# Altium PCB PCB.PcbDoc (part 2 of 3)
Units mm, origin at the board's own origin, x right, y up, seen from the top; angles counter-clockwise.
Board outline 103.89 x 68.2 mm, 6 copper layers (Top Layer, GND1, Internal 1, VCC, Internal 2, Bottom Layer), stack 0.851 mm thick; 117 components, 96 nets, 737 pads, 258 vias.
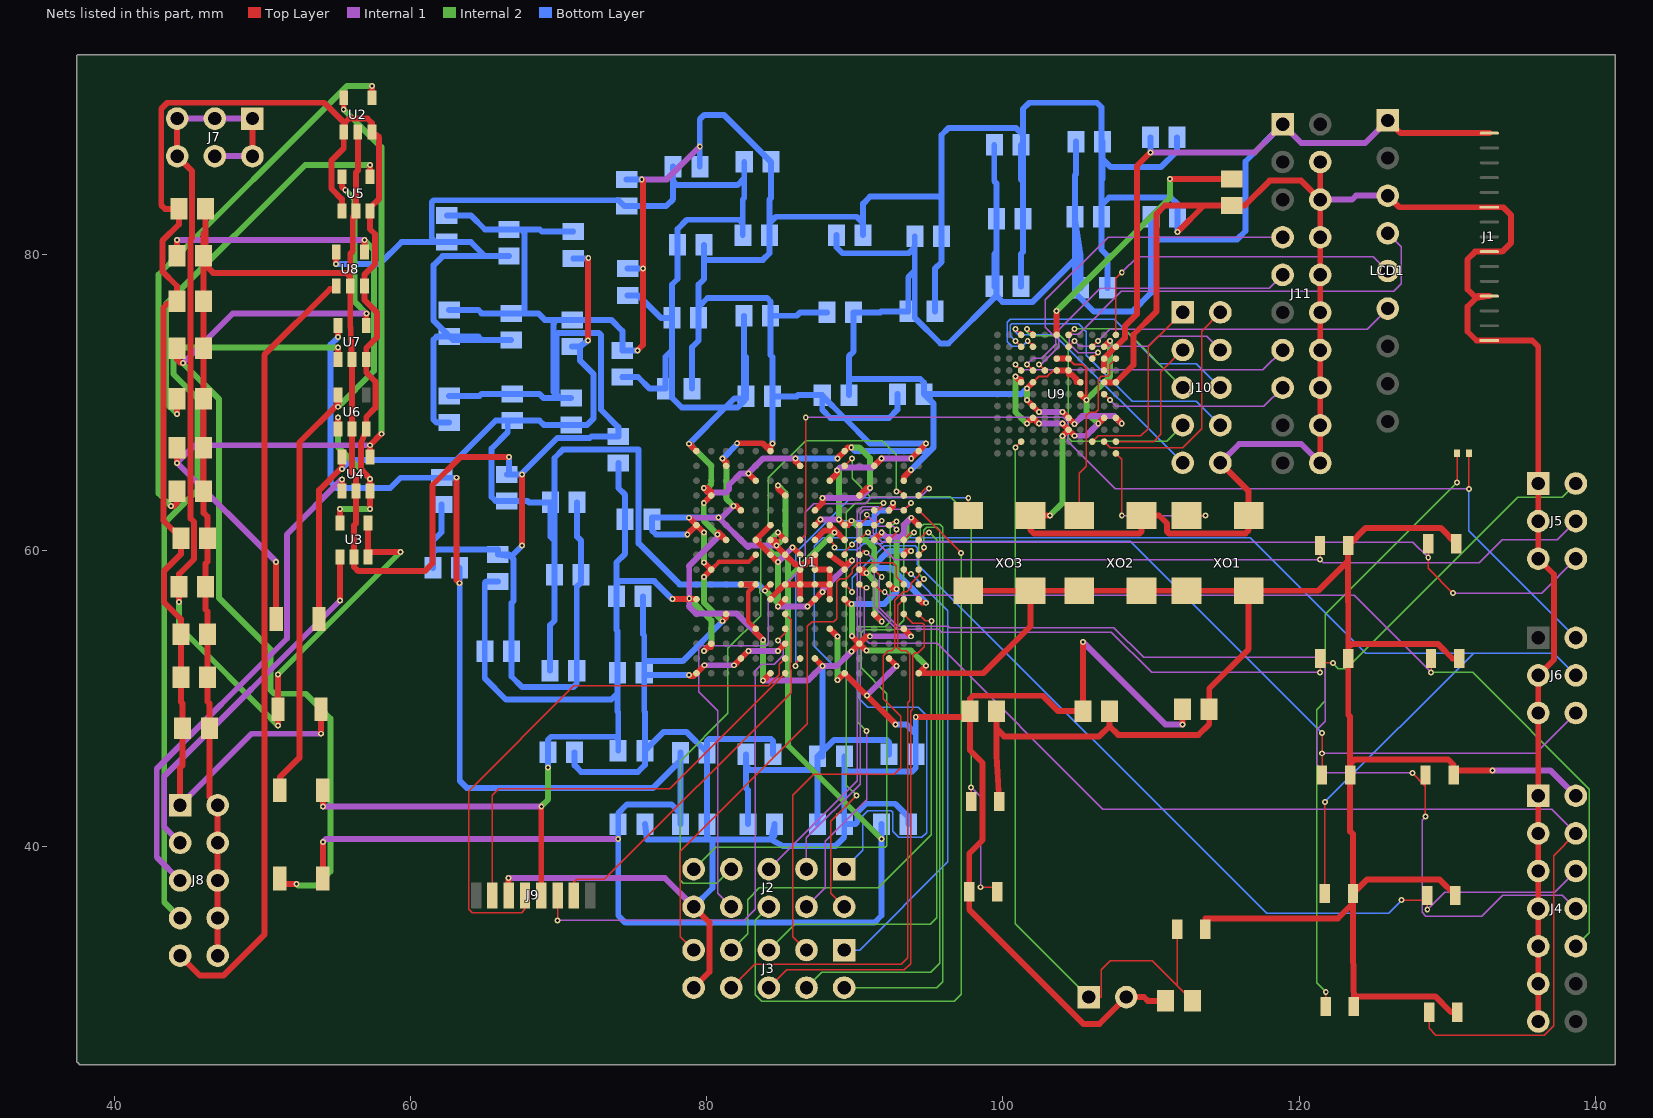
[diagram p6: the nets of this part, all layers, seen from the top]

## Via types
v1: diameter 0.4, hole 0.2, Top Layer to Bottom Layer, tented both sides, 258 vias

## Nets (pads, with @x,y where several pads share a name; then routed paths per layer and width w, separated by ;. In a path a pad name is that pad's centre, name@x,y a point inside that pad or via, vN(x,y) a via of type N, cw(c..) or ccw(c..) an arc to the next point about the centre after c; other vN are vias at no path point) (continued)
GND: C1.1 C2.1 C3.1 C4.1 C5.1 C6.1 C7.1 C8.1 C9.1 C10.1 C11.1 C12.1 C13.1 C14.1 C15.1 C16.1 C17.1 C18.1 C19.1 C20.1 C21.1 C22.1 C23.1 C24.1 C25.1 C26.1 C27.1 C28.1 C29.1 C30.1 C31.1 C32.1 C33.1 C34.1 C35.1 C36.1 C37.1 C38.1 C39.1 C40.1 C41.1 C42.1 C43.1 C44.1 C45.1 C46.1 C47.1 C48.1 C49.1 C50.1 C51.1 C52.1 C53.1 C54.1 C55.1 C56.1 C57.1 C58.1 C59.1 C60.1 C61.1 C62.1 C63.1 C64.1 C65.1 C66.1 C67.1 C68.1 C69.1 C70.1 C71.1 C72.1 C73.1 C74.1 J1.1 J1.4 J1.7 J1.10 J2.10 J3.10 J4.1 J4.3 J4.5 J4.7 J4.9 J4.11 J4.13 J5.1 J5.3 J5.5 J6.3 J6.5 J8.2 J8.4 J8.6 J8.8 J8.10 J9.6 J10.10 J11.4 J11.6 J11.8 J11.10 J11.12 J11.14 J11.16 J11.18 J11.20 LCD1.3 R2.2 SW1.2 U1.A1 U1.A11 U1.B8 U1.C5 U1.C15 U1.D2 U1.D12 U1.E9 U1.F6 U1.F10 U1.F16 U1.G3 U1.G7 U1.G9 U1.G13 U1.H6 U1.H7 U1.H8 U1.J7 U1.J8 U1.J9 U1.J11 U1.K4 U1.K6 U1.K7 U1.K8 U1.K14 U1.L1 U1.L11 U1.M8 U1.N5 U1.N15 U1.P2 U1.P12 U1.R9 U1.T6 U1.T16 U2.2 U3.2 U4.2 U5.2 U6.2 U7.2 U8.2 U9.C7 U9.D4 U9.F9 U9.G3 U9.G9 U9.H6 U9.K4 U9.K7 U9.K10 U9.L7 XO1.2 XO2.2 XO3.2 | length 863
  Top Layer w0.14: U9.G9@104.432,72.948 104.837,72.543 105.396,72.543 105.627,72.312 105.627,70.166 v1(105.639,70.155)
  Top Layer w0.3: U1.B8@80.312,58.706 80.828,59.222 82.828,59.222 U1.E9@83.312,59.706
  Top Layer w0.4: C48.1@46.173,83.058 46.173,81.509 ; J8.10@46.99,32.639 J8.8@46.99,35.179 J8.6@46.99,37.719 J8.4@46.99,40.259 J8.2@46.99,42.799 46.427,43.362 C54.1@46.427,48.006 46.427,49.657 46.3,49.784 C55.1@46.3,51.435 C49.1@46.3,54.356 46.3,55.88 46.173,56.007 C47.1@46.173,57.531 46.173,59.106 46.3,59.233 C44.1@46.3,60.833 46.3,62.281 46.046,62.535 C45.1@46.046,64.008 C46.1@46.046,66.929 C50.1@46.046,70.231 C51.1@46.046,73.66 C52.1@46.046,76.835 C53.1@46.046,79.883 46.046,81.382 46.173,81.509 ; U2.2@56.449,88.258 56.449,85.649 56.322,85.522 U5.2@56.322,82.924 56.322,82.525 56.109,82.525 56.109,80.203 55.941,80.035 55.941,78.476 ; v1(66.624,37.871) 66.636,37.86 J9.6@66.636,36.703 ; v1(66.65,66.319) 63.398,66.319 61.493,64.414 61.493,59.131 60.96,58.598 56.49,58.598 56.195,58.892 U3.2@56.195,59.556 56.195,61.697 56.322,61.824 U4.2@56.322,64.001 56.322,65.001 56.068,65.255 U6.2@56.068,68.192 U7.2@56.068,72.891 55.941,75.413 U8.2@55.941,77.844 55.941,78.476 ; v1(67.539,60.325) v1(67.539,65.132) ; v1(75.336,73.51) 75.692,73.865 v1(75.692,79.021) 75.692,84.975 v1(75.619,85.048) ; v1(78.693,61.087) U1.A11@79.312,61.706 ; v1(78.812,62.206) U1.A11@79.312,61.706 ; v1(78.816,51.587) 78.892,51.511 79.117,51.511 U1.A1@79.312,51.706 v1(79.853,52.247) ; J3.10@79.121,30.48 80.188,31.547 80.188,34.874 J2.10@79.121,35.941 ; v1(79.823,58.217) U1.B8@80.312,58.706 v1(79.823,59.195) ; v1(79.823,61.195) U1.A11@79.312,61.706 ; v1(81.073,55.22) 81.312,55.459 U1.C5@81.312,55.706 ; v1(81.077,66.192) 81.312,65.957 U1.C15@81.312,65.706 ; v1(81.812,63.003) 82.015,63.003 U1.D12@82.312,62.706 ; v1(81.853,52.247) U1.D2@82.312,52.706 v1(82.819,53.213) ; v1(82.065,67.234) 83.784,67.234 U1.F16@84.312,66.706 84.312,67.058 v1(84.46,67.206) ; U1.F6@84.312,56.706 84.312,56.749 85.269,57.706 U1.G7@85.312,57.706 U1.H7@86.312,57.706 ; v1(84.811,53.213) 84.819,53.213 U1.G3@85.312,53.706 ; v1(84.811,64.389) 84.811,64.207 U1.G13@85.312,63.706 ; U1.H6@86.312,56.706 U1.H7@86.312,57.706 ; U1.H8@86.312,58.706 U1.H7@86.312,57.706 ; U1.J11@87.312,61.706 v1(87.684,62.078) ; U1.K4@88.312,54.706 v1(88.824,54.194) ; U1.K6@88.312,56.706 U1.K7@88.312,57.706 ; U1.K14@88.312,64.706 88.812,65.206 v1(88.812,65.409) ; v1(88.824,51.257) 88.863,51.257 U1.L1@89.312,51.706 v1(90.812,50.206) v1(92.758,48.26) ; v1(88.94,62.078) U1.L11@89.312,61.706 89.56,61.706 89.56,61.773 v1(89.789,62.001) ; U1.N5@91.312,55.706 91.821,55.197 v1(91.821,55.194) ; U1.N15@91.312,65.706 v1(91.812,66.206) ; U1.P2@92.312,52.706 v1(92.812,52.206) ; U1.P12@92.312,62.706 92.573,62.967 v1(92.573,63.195) ; U1.R9@93.312,59.706 93.575,59.969 v1(93.802,59.969) ; v1(93.812,66.206) U1.T16@94.312,66.706 94.814,67.208 v1(94.818,67.208) ; v1(94.118,48.743) C74.1@97.779,48.743 ; U1.T6@94.312,56.706 94.554,56.464 v1(94.818,56.464) ; v1(100.838,71.755) 101.041,71.552 101.232,71.552 U9.C7@101.232,71.348 ; v1(101.625,68.555) 101.625,68.599 101.784,68.758 101.842,68.758 U9.D4@102.032,68.948 v1(102.425,68.555) ; v1(103.175,62.357) XO3.2@101.863,62.357 101.863,61.366 102.092,61.138 109.229,61.138 109.356,61.265 XO2.2@109.356,62.357 110.541,62.357 111.074,61.824 111.074,61.265 111.201,61.138 116.366,61.138 116.595,61.366 XO1.2@116.595,62.357 116.595,63.999 J10.10@114.681,65.913 ; U9.F9@103.632,72.948 U9.G9@104.432,72.948 ; v1(104.013,67.729) U9.G3@104.432,68.148 ; v1(104.025,68.555) U9.G3@104.432,68.148 ; v1(104.838,67.742) U9.G3@104.432,68.148 ; U9.H6@105.232,70.548 105.625,70.155 v1(105.639,70.155) ; v1(105.399,53.823) C72.1@105.399,49.149 103.734,49.149 102.692,50.19 97.982,50.19 97.779,49.987 C74.1@97.779,49.149 C74.1@97.779,48.743 ; v1(106.439,68.555) U9.K4@106.832,68.948 ; U9.K7@106.832,71.348 U9.L7@107.632,71.348 108.814,72.53 108.814,74.574 110.363,76.124 110.363,82.705 110.947,83.289 113.579,83.289 ; U9.K10@106.832,73.748 v1(107.232,74.148) ; C56.1@110.987,29.591 109.779,29.591 109.525,29.845 SW1.2@108.331,29.845 106.528,28.042 105.435,28.042 97.729,35.748 R2.2@97.729,36.957 97.729,39.538 98.628,40.437 98.628,45.658 97.779,46.507 C74.1@97.779,48.743 ; v1(111.799,81.509) 113.579,83.289 ; v1(112.13,48.26) C73.1@112.13,49.276 ; J11.20@121.424,65.901 J11.18@121.424,68.441 J11.16@121.424,70.981 J11.14@121.424,73.521 J11.12@121.424,76.061 J11.10@121.424,78.601 J11.8@121.424,81.141 J11.6@121.424,83.681 ; J11.4@121.424,86.221 J11.6@121.424,83.681 ; LCD1.3@125.984,83.947 126.763,83.168 J1.10@132.842,83.168 133.782,83.168 134.315,82.635 134.315,80.778 133.706,80.168 J1.7@132.842,80.168 131.882,80.168 131.369,79.654 131.369,77.622 131.952,77.04 ; J4.13@136.144,28.194 J4.11@136.144,30.734 J4.9@136.144,33.274 J4.7@136.144,35.814 J4.5@136.144,38.354 J4.3@136.144,40.894 J4.1@136.144,43.434 J6.5@136.144,49.022 J6.3@136.144,51.562 137.211,52.629 137.211,58.369 J5.5@136.144,59.436 J5.3@136.144,61.976 J5.1@136.144,64.516 136.144,73.762 135.738,74.168 J1.1@132.842,74.168 131.978,74.168 131.369,74.778 131.369,76.457 131.952,77.04 ; 46.173,81.509 46.173,79.248 46.681,78.74 55.677,78.74 55.941,78.476 ; v1@84.709,60.309 U1.G9@85.312,59.706 85.963,59.055 86.661,59.055 U1.J9@87.312,59.706 U1.J8@87.312,58.706 U1.K8@88.312,58.706 U1.K7@88.312,57.706 ; v1@84.709,60.309 v1(84.709,60.325) 84.709,60.579 84.582,60.706 U1.F10@84.312,60.706 v1@84.709,60.309 ; U1.H7@86.312,57.706 U1.J7@87.312,57.706 U1.K7@88.312,57.706 ; 113.579,83.289 C57.1@115.455,83.289 116.332,83.289 118.006,84.963 120.142,84.963 J11.6@121.424,83.681 ; 131.952,77.04 J1.4@132.842,77.168 132.08,77.168 131.952,77.04 ; U1.M8@90.312,58.706 90.57,58.706 v1(90.805,58.471) 90.547,58.471 U1.M8@90.312,58.706
  Internal 1 w0.4: v1(66.624,37.871) 77.191,37.871 J2.10@79.121,35.941 ; v1(75.619,85.048) 77.309,85.048 v1(79.536,87.274) ; v1(78.812,62.206) 80.797,62.227 v1@80.8,62.227 ; v1(79.853,52.247) v1(81.853,52.247) ; v1(80.797,62.23) v1@80.8,62.227 ; v1(81.812,63.003) 81.039,62.23 v1@80.8,62.227 ; v1(82.819,53.213) v1(84.811,53.213) ; v1(84.709,60.325) 82.906,60.325 82.804,60.223 v1@80.8,62.227 ; v1(87.684,62.078) v1(88.94,62.078) ; v1(88.812,65.409) 89.011,65.608 91.214,65.608 v1(91.812,66.206) v1(93.812,66.206) ; v1(90.812,50.206) v1(92.812,52.206) ; v1(102.425,68.555) v1(104.025,68.555) ; v1(104.838,67.742) 105.626,67.742 v1(106.439,68.555) ; v1(105.399,53.823) 110.962,48.26 v1(112.13,48.26) ; J10.10@114.681,65.913 115.951,67.183 120.142,67.183 J11.20@121.424,65.901 ; J11.6@121.424,83.681 123.571,83.681 123.837,83.947 LCD1.3@125.984,83.947
  Internal 2 w0.4: v1(79.823,58.217) 79.823,56.47 v1(81.073,55.22) ; v1(79.823,59.195) v1(79.823,61.195) ; v1(81.077,66.192) 81.331,65.938 81.331,63.484 v1(81.812,63.003) ; v1(84.709,60.325) 85.319,60.935 85.319,63.881 v1(84.811,64.389) ; v1(88.812,65.409) 88.94,65.281 v1(88.94,62.078) ; v1(88.824,51.257) v1(88.824,54.194) ; v1(89.789,62.001) 89.814,62.001 90.322,61.493 90.322,60.96 90.576,60.706 90.754,60.706 91.313,60.147 91.313,58.979 v1(90.805,58.471) 91.389,57.887 91.389,55.626 v1(91.821,55.194) ; v1(100.838,71.755) 100.838,69.342 v1(101.625,68.555) ; v1(103.175,62.357) 104.013,63.195 v1(104.013,67.729) ; v1(106.439,68.555) 105.639,69.355 v1(105.639,70.155) 107.239,71.755 107.232,71.762 v1(107.232,74.148)
  Bottom Layer w0.4: C35.1@61.53,58.818 61.53,59.828 ; C36.1@62.103,63.108 62.103,61.229 61.53,60.655 61.53,59.828 ; C39.1@62.468,82.623 64.084,82.623 65.04,81.667 C12.1@66.657,81.667 67.462,81.667 ; C37.1@62.615,70.423 64.668,70.423 64.815,70.57 C10.1@66.877,70.57 68.707,70.57 69.001,70.276 70.084,70.276 ; C38.1@62.615,76.229 64.592,76.229 64.813,76.008 C11.1@66.804,76.008 67.564,76.008 ; C9.1@66.51,65.132 C9.1@66.65,65.132 ; v1(66.65,66.319) C9.1@66.65,65.132 ; v1(67.539,60.325) 66.788,59.574 ; v1(67.539,65.132) v1@67.462,65.132 ; C21.1@70.846,70.276 70.104,70.276 ; C23.1@70.993,81.52 68.879,81.52 68.732,81.667 67.462,81.667 ; C43.1@71.084,46.373 71.084,45.487 71.526,45.045 75.358,45.045 75.83,45.517 C28.1@75.83,46.482 ; C20.1@71.258,63.246 71.258,60.923 71.525,60.655 C19.1@71.525,58.352 71.525,57.836 71.231,57.542 C18.1@71.231,51.885 71.231,51.003 71.021,50.793 67.52,50.793 66.822,51.491 C29.1@66.822,53.208 66.822,56.439 66.954,56.571 66.954,59.407 66.788,59.574 ; C3.1@74.3,73.51 C3.1@74.32,73.51 ; C5.1@74.594,85.048 v1(75.619,85.048) ; C4.1@74.667,79.021 v1(75.692,79.021) ; v1(75.336,73.51) C3.1@74.32,73.51 ; C17.1@75.703,56.896 75.703,54.339 75.788,54.254 75.788,52.527 ; C34.1@75.83,41.529 75.982,40.488 80.264,40.488 ; v1(78.693,61.087) 76.582,61.087 76.302,61.366 C1.1@76.302,62.1 76.302,62.23 v1(80.797,62.23) ; v1(78.816,51.587) C16.1@75.788,51.587 ; C40.1@79.021,70.919 79.021,73.733 79.462,74.174 C13.1@79.462,75.696 79.462,76.44 ; J2.10@79.121,35.941 80.391,37.211 80.391,40.488 ; C6.1@79.536,85.912 v1(79.536,87.274) 79.536,89.101 79.843,89.408 81.164,89.408 C7.1@84.339,86.233 84.339,83.793 84.239,83.693 84.239,82.093 ; C24.1@79.83,80.62 79.83,79.654 ; v1(81.073,55.22) 78.38,52.527 75.788,52.527 ; v1(81.077,66.192) 82.065,67.18 v1(82.065,67.234) ; v1(84.46,67.206) C14.1@84.46,70.405 ; C26.1@84.466,46.228 84.466,47.142 84.339,47.269 80.148,47.269 80.021,47.142 C31.1@80.021,46.355 ; C62.1@88.127,76.073 86.31,76.073 86.081,75.843 C25.1@84.313,75.843 ; v1(88.94,62.078) 89.169,61.849 91.034,61.849 91.313,62.128 91.313,62.382 91.618,62.687 92.268,62.687 92.573,62.992 v1(92.573,63.195) ; C15.1@89.292,46.101 89.292,45.314 ; C67.1@90.562,81.28 90.562,82.093 ; v1(90.805,58.471) 91.161,58.826 ; v1(92.758,48.26) 93.472,48.26 94.118,47.614 ; C64.1@92.875,70.552 92.875,69.494 92.316,68.936 89.303,68.936 ; C32.1@93.61,41.529 93.61,42.017 92.729,42.898 90.763,42.898 90.17,42.305 90.17,41.656 90.043,41.529 C42.1@89.292,41.529 ; v1(93.802,59.969) 92.304,59.969 91.161,58.826 ; v1(94.118,48.743) 94.118,47.614 ; v1(94.818,56.464) 92.456,58.826 91.161,58.826 ; v1(94.818,67.208) 91.031,67.208 89.303,68.936 ; C63.1@95.41,76.137 95.41,79.016 95.851,79.457 C68.1@95.851,81.208 95.851,83.718 ; C69.1@101.216,77.828 101.216,80.01 101.363,80.157 C59.1@101.363,82.384 101.363,84.887 ; C70.1@101.219,87.376 101.219,85.031 101.363,84.887 ; C71.1@106.728,87.602 106.728,86.439 ; C58.1@107.05,77.724 107.05,79.908 106.654,80.304 C60.1@106.654,82.531 106.654,83.312 ; C66.1@111.76,87.884 111.76,86.97 110.668,85.877 107.29,85.877 106.728,86.439 ; v1(111.799,81.509) C61.1@111.799,82.531 111.799,83.375 111.354,83.82 107.162,83.82 106.654,83.312 ; 61.53,59.828 61.773,60.071 65.913,60.071 C30.1@65.913,59.712 ; C30.1@65.913,59.712 66.65,59.712 66.788,59.574 ; C30.1@65.913,59.712 66.788,59.574 ; C9.1@66.65,65.132 v1@67.462,65.132 ; v1@67.462,65.132 69.92,67.589 72.111,67.589 72.223,67.702 C2.1@74.041,67.702 74.041,68.326 72.873,69.494 72.873,74.549 72.746,74.676 69.977,74.676 69.875,74.574 69.875,70.505 70.104,70.276 ; 67.462,81.667 67.691,81.439 67.691,76.135 67.564,76.008 ; 67.564,76.008 68.631,76.008 69.072,75.567 69.901,75.567 ; 69.901,75.567 C22.1@70.919,75.567 73.558,75.567 74.32,74.805 C3.1@74.32,73.51 ; 69.901,75.567 69.647,75.313 69.647,70.714 70.084,70.276 ; 70.084,70.276 70.104,70.276 ; C16.1@75.788,51.587 75.788,49.115 75.83,49.073 C28.1@75.83,46.482 ; C16.1@75.788,51.587 C16.1@75.788,51.738 75.788,52.527 ; C28.1@75.83,46.482 77.1,47.752 78.624,47.752 C31.1@80.021,46.355 ; 79.462,76.44 80.061,77.038 84.084,77.038 84.313,76.81 C25.1@84.313,75.843 ; 79.462,76.44 79.462,77.953 79.83,78.32 79.83,79.654 ; 79.83,79.654 79.868,79.617 83.795,79.617 84.239,80.061 C8.1@84.239,81.282 84.239,82.093 ; C31.1@80.021,46.355 C33.1@80.021,41.529 80.021,40.731 80.264,40.488 ; 80.264,40.488 80.391,40.488 ; 80.391,40.488 84.328,40.488 ; 84.239,82.093 84.671,82.525 90.13,82.525 90.562,82.093 ; C25.1@84.313,75.843 84.313,73.197 84.46,73.05 C14.1@84.46,70.405 ; 84.328,40.488 84.593,40.753 C27.1@84.593,41.529 84.328,40.488 ; 84.328,40.488 85.203,40.03 88.682,40.03 89.292,40.64 C42.1@89.292,41.529 ; C14.1@84.46,70.405 86.081,70.405 86.154,70.478 C65.1@87.804,70.478 C65.1@87.804,70.435 ; C65.1@87.804,70.435 89.303,68.936 ; C65.1@87.804,70.435 87.804,69.494 88.363,68.936 89.303,68.936 ; C42.1@89.292,41.529 89.292,45.314 ; 89.292,45.314 89.535,45.071 93.878,45.071 94.118,45.31 C41.1@94.118,46.228 94.118,47.614 ; 90.562,82.093 90.562,83.41 91.034,83.882 95.688,83.882 95.851,83.718 ; 95.851,83.718 95.851,88.045 96.317,88.511 100.897,88.511 C70.1@101.363,88.045 ; 101.363,84.887 C70.1@101.363,88.045 ; C70.1@101.363,88.045 101.363,89.814 101.769,90.221 106.35,90.221 106.654,89.916 106.654,85.014 ; 106.654,83.312 106.654,85.014 ; 106.654,85.014 106.728,85.087 106.728,86.439
ISENS_1V0: J8.5 U4.1 | length 33.7
  Top Layer w0.4: U4.1@55.372,64.001 v1(55.372,64.795)
  Internal 1 w0.4: J8.5@44.45,37.719 42.875,39.294 42.875,45.263 51.664,54.051 51.664,61.087 v1(55.372,64.795)
ISENS_1V8: J8.7 U7.1 | length 52.1
  Top Layer w0.4: U7.1@55.118,72.891 v1(55.118,73.685)
  Internal 2 w0.4: J8.7@44.45,35.179 43.383,36.246 43.383,61.824 45.618,64.059 45.618,70.281 43.992,71.907 43.992,72.984 44.694,73.685 v1(55.118,73.685)
ISENS_3V3: J8.9 U8.1 | length 53.4
  Top Layer w0.4: J8.9@44.45,32.639 45.796,31.293 47.371,31.293 50.14,34.061 50.14,73.203 54.585,77.648 54.991,77.648 U8.1@54.991,77.844
ISENS_UNREG: J8.3 U3.1 | length 24.7
  Top Layer w0.4: v1(55.245,56.617) U3.1@55.245,59.556
  Internal 1 w0.4: J8.3@44.45,40.259 43.383,41.326 43.383,44.755 v1(55.245,56.617)
NetC45_2: C45.2 U2.4 | length 37.8
  Top Layer w0.4: v1(43.84,62.992) 44.043,62.992 44.246,63.195 C45.2@44.246,64.008 ; U2.4@57.399,90.558 57.399,91.359 v1(57.404,91.364)
  Internal 2 w0.4: v1(43.84,62.992) 42.992,63.84 42.992,78.629 55.728,91.364 v1(57.404,91.364)
NetC46_2: C46.2 R13.2 U2.5 U4.4 | length 53.5
  Top Layer w0.4: v1(44.246,65.913) C46.2@44.246,66.929 ; R13.2@50.935,55.372 v1(50.935,59.224) ; v1(55.499,89.764) U2.5@55.499,90.558 ; U4.4@57.272,66.301 v1(57.272,67.101) v1(58.039,67.874)
  Internal 1 w0.4: v1(50.935,59.224) v1(44.246,65.913) 45.434,67.101 v1(57.272,67.101)
  Internal 2 w0.4: v1(55.499,89.764) 58.039,87.224 v1(58.039,67.874)
NetC50_2: C50.2 U5.4 | length 27.2
  Top Layer w0.4: v1(44.247,69.215) C50.2@44.246,70.231 ; U5.4@57.272,85.224 57.272,86.02 v1(57.277,86.025)
  Internal 2 w0.4: v1(44.247,69.215) 43.492,69.969 43.492,76.614 52.903,86.025 v1(57.277,86.025)
NetC51_2: C51.2 R15.2 U5.5 U7.4 | length 69.6
  Top Layer w0.4: C51.2@44.246,73.66 44.246,72.899 44.501,72.644 v1(44.652,72.644) ; R15.2@51.189,37.846 51.189,37.49 v1(52.299,37.49) ; U5.5@55.372,85.224 55.372,84.557 v1(55.601,84.328) ; U7.4@57.018,75.191 57.018,75.992 v1(57.023,75.997)
  Internal 1 w0.4: v1(44.652,72.644) 48.005,75.997 v1(57.023,75.997)
  Internal 2 w0.4: v1(44.652,72.644) 47.066,70.23 47.066,56.794 50.562,53.299 50.562,50.563 50.8,50.325 52.934,50.325 54.61,48.649 54.61,38.329 53.67,37.389 52.4,37.389 v1(52.299,37.49) ; v1(55.601,84.328) 56.236,83.693 56.236,76.784 v1(57.023,75.997)
NetC53_2: C53.2 R16.2 U6.5 U8.4 | length 55.5
  Top Layer w0.4: C53.2@44.246,79.883 v1(44.246,80.944) ; R16.2@51.189,43.815 51.189,44.687 52.502,45.999 52.502,67.285 55.118,69.901 ; v1(55.118,69.698) 55.118,69.901 ; U6.5@55.118,70.492 55.118,69.901 ; U8.4@56.891,80.144 v1(56.891,80.944)
  Internal 1 w0.4: v1(44.246,80.944) v1(56.891,80.944)
  Internal 2 w0.4: v1(55.118,69.698) 57.531,72.111 57.531,80.304 v1(56.891,80.944)
NetC57_2: C57.2 U9.F11 | length 17.9
  Top Layer w0.4: U9.F11@103.632,74.548 v1(103.632,76.175) ; v1(111.277,85.089) C57.2@115.455,85.089
  Internal 2 w0.4: v1(103.632,76.175) 111.277,83.82 v1(111.277,85.089)
NetD1_1: D1.1 J6.2 U1.H10 | length 71.4
  Top Layer w0.1: U1.H10@86.312,60.706 86.69,61.084 v1(86.69,68.986) ; v1(131.464,64.16) D1.1@131.464,66.548
  Internal 1 w0.1: v1(86.69,68.986) 104.089,68.986 104.394,68.682 104.394,67.361 107.594,64.16 v1(131.464,64.16)
  Bottom Layer w0.1: v1(131.464,64.16) 131.464,61.322 J6.2@138.684,54.102
NetD1_2: D1.2 R10.2 | length 41.5
  Top Layer w0.1: R10.2@121.798,29.21 v1(121.798,30.201) ; v1(130.664,64.592) D1.2@130.664,66.548
  Internal 2 w0.1: v1(121.798,30.201) 121.183,30.815 121.183,49.251 121.768,49.835 121.768,55.696 v1(130.664,64.592)
NetJ4_4: J4.4 R3.2 U1.M7 | length 81.1
  Top Layer w0.1: U1.M7@90.312,57.706 90.538,57.48 v1(90.805,57.48) ; R3.2@128.778,28.829 128.778,27.737 129.235,27.28 136.55,27.28 137.185,27.915 137.185,39.395 J4.4@138.684,40.894
  Internal 1 w0.1: v1(90.805,57.48) 90.653,57.328 90.653,54.051 90.983,53.721 95.555,53.721 106.756,42.52 137.058,42.52 J4.4@138.684,40.894
NetJ4_6: J4.6 R4.2 U1.L7 | length 64.7
  Top Layer w0.1: U1.L7@89.312,57.706 v1(89.814,57.204) ; v1(126.924,36.398) R4.2@128.651,36.398 ; v1(128.651,35.753) R4.2@128.651,36.398 ; R4.2@128.651,36.703 R4.2@128.651,36.398
  Internal 1 w0.1: v1(128.651,35.753) 129.83,36.932 137.262,36.932 J4.6@138.684,38.354
  Bottom Layer w0.1: v1(89.814,57.204) 89.814,58.141 91.999,60.325 94.082,60.325 94.234,60.173 94.234,59.08 117.805,35.509 126.035,35.509 v1(126.924,36.398)
NetJ4_8: J4.8 R5.2 U1.N8 | length 70.2
  Top Layer w0.1: U1.N8@91.312,58.706 v1(91.821,58.197) ; v1(127.64,44.983) 128.529,44.094 ; v1(128.529,42.022) 128.529,44.094 ; R5.2@128.529,44.831 128.529,44.094
  Internal 1 w0.1: v1(91.821,58.197) 91.669,58.045 91.669,56.137 92.913,54.893 96.291,54.893 96.397,54.788 107.493,54.788 109.499,52.781 121.107,52.781 121.768,52.121 121.768,48.463 121.183,47.879 121.183,45.517 121.717,44.983 v1(127.64,44.983) ; v1(128.529,42.022) 128.295,41.788 128.295,35.56 128.549,35.306 132.334,35.306 133.756,36.728 137.77,36.728 J4.8@138.684,35.814
NetJ4_10: J4.10 R6.2 U1.N7 | length 65.9
  Top Layer w0.1: U1.N7@91.312,57.706 91.817,57.201 v1(92.024,57.201) ; v1(128.905,51.765) R6.2@128.905,52.705
  Internal 1 w0.1: v1(92.024,57.201) 92.263,56.962 123.708,56.962 v1(128.905,51.765)
  Internal 2 w0.1: v1(128.905,51.765) 131.724,51.765 139.598,43.891 139.598,34.188 J4.10@138.684,33.274
NetJ5_2: J5.2 R7.2 U1.M9 | length 60
  Top Layer w0.1: U1.M9@90.312,59.706 90.627,60.021 v1(90.805,59.842) ; v1(121.412,51.765) 121.417,51.77 R7.2@121.417,52.4 ; R7.2@121.417,52.705 R7.2@121.417,52.4 ; v1(122.276,52.4) R7.2@121.417,52.4
  Internal 1 w0.1: v1(90.805,59.842) 91.313,59.334 91.313,56.21 92.83,54.693 95.675,54.693 95.885,54.483 107.315,54.483 110.033,51.765 v1(121.412,51.765)
  Internal 2 w0.1: v1(122.276,52.4) 122.657,52.019 123.165,52.019 134.747,63.602 137.77,63.602 J5.2@138.684,64.516
NetJ5_4: J5.4 R8.2 U1.M10 | length 51.5
  Top Layer w0.1: U1.M10@90.312,60.706 90.812,61.206 v1(90.89,61.206) ; v1(121.412,59.385) R8.2@121.412,60.325
  Internal 1 w0.1: v1(90.89,61.206) 92.711,59.385 v1(121.412,59.385) 121.641,59.157 132.156,59.157 133.706,60.706 137.414,60.706 J5.4@138.684,61.976
NetJ5_6: J5.6 R9.2 U1.M11 | length 53.8
  Top Layer w0.1: U1.M11@90.312,61.706 90.811,62.205 v1(90.811,62.408) ; R9.2@128.717,60.452 v1(128.717,59.522) 128.717,58.786 v1(130.378,57.125)
  Internal 1 w0.1: v1(90.811,62.408) 91.262,61.956 91.262,61.16 91.863,60.559 127.68,60.559 v1(128.717,59.522) ; v1(130.378,57.125) 136.373,57.125 J5.6@138.684,59.436
NetJ6_4: J6.4 R11.2 U1.L9 | length 74.2
  Top Layer w0.1: U1.L9@89.312,59.706 89.312,59.944 89.357,59.944 v1(89.814,60.401) ; R11.2@121.732,36.83 v1(121.732,43.017)
  Bottom Layer w0.1: v1(89.814,60.401) 90.052,60.638 91.293,60.638 91.513,60.858 116.688,60.858 124.485,53.061 131.775,53.061 ; v1(121.732,43.017) 131.775,53.061 ; J6.4@138.684,51.562 137.185,53.061 131.775,53.061
NetJ6_6: J6.6 R12.2 U1.K10 | length 60.3
  Top Layer w0.1: U1.K10@88.312,60.706 88.621,60.397 v1(88.621,60.198) ; R12.2@121.544,44.831 v1(121.544,46.304) v1(121.544,47.671)
  Internal 1 w0.1: v1(121.544,46.304) 135.966,46.304 J6.6@138.684,49.022
  Bottom Layer w0.1: v1(88.621,60.198) 88.773,60.046 90.17,60.046 90.563,60.438 91.818,60.438 91.984,60.604 108.61,60.604 v1(121.544,47.671)
NetLCD1_4: LCD1.4 U9.J9 | length 31
  Top Layer w0.1: U9.J9@106.032,72.948 106.032,73.152 106.223,73.152 v1(106.426,73.355)
  Internal 1 w0.1: v1(106.426,73.355) 105.08,73.355 104.47,73.965 104.47,74.371 104.699,74.6 105.105,74.6 108.001,77.495 126.39,77.495 126.898,78.003 126.898,80.493 LCD1.4@125.984,81.407
NetLCD1_5: LCD1.5 U9.L11 | length 23.2
  Top Layer w0.1: U9.L11@107.632,74.548 107.632,78.371 v1(108.026,78.765)
  Internal 1 w0.1: v1(108.026,78.765) 109.093,79.832 125.019,79.832 LCD1.5@125.984,78.867
NetLCD1_6: LCD1.6 U9.J10 | length 21
  Top Layer w0.1: U9.J10@106.032,73.748 v1(106.426,74.143)
  Internal 1 w0.1: v1(106.426,74.143) 107.213,74.93 124.587,74.93 LCD1.6@125.984,76.327
NetR1_2: R1.2 R2.1 U1.L15 | length 38.8
  Top Layer w0.1: U1.L15@89.312,65.706 89.814,66.208 v1(89.814,66.218) ; R1.2@97.856,43.053 v1(97.856,44.003) ; v1(98.501,37.262) 99.629,37.262 R2.1@99.629,36.957
  Internal 1 w0.1: v1(97.856,44.003) 98.501,43.358 v1(98.501,37.262)
  Internal 2 w0.1: v1(89.814,66.218) 89.814,64.859 91.046,63.627 96.444,63.627 97.856,62.215 v1(97.856,44.003)
NetU1_H2: U1.H2 XO3.3@97.663,62.357 | length 22.7
  Top Layer w0.1: v1(86.004,52.197) 86.004,52.398 U1.H2@86.312,52.706 ; XO3.3@97.663,62.357 v1(97.663,63.551)
  Bottom Layer w0.1: v1(86.004,52.197) 86.004,59.842 89.713,63.551 v1(97.663,63.551)
NetU9_L1: U9.L1 XO1.3@112.395,62.357 | length 11.3
  Top Layer w0.1: U9.L1@107.632,66.548 108.026,66.154 v1(108.026,62.357) ; XO1.3@112.395,62.357 v1(113.69,62.357)
  Internal 1 w0.1: v1(108.026,62.357) v1(113.69,62.357)
NetU9_L9: U9.L9 XO2.3@105.156,62.357 | length 12.1
  Top Layer w0.1: XO2.3@105.156,62.357 105.156,65.202 105.639,65.684 105.639,69.113 105.867,69.342 106.274,69.342 106.426,69.494 106.426,71.526 106.655,71.755 107.086,71.755 107.213,71.882 107.213,72.529 U9.L9@107.632,72.948
RESET: J11.15 U9.K6 | length 12.9
  Top Layer w0.1: U9.K6@106.832,70.548 v1(107.225,70.155)
  Internal 1 w0.1: v1(107.225,70.155) 107.657,69.723 117.626,69.723 J11.15@118.884,70.981
SDBUS_CLK: J9.5 U1.G2 | length 38.4
  Top Layer w0.1: J9.5@67.736,36.703 67.736,35.763 67.507,35.535 64.16,35.535 63.932,35.763 63.932,43.739 71.044,50.851 84.15,50.851 84.912,51.613 84.912,52.306 U1.G2@85.312,52.706
SDBUS_DI: J9.3 U1.G4 | length 35.9
  Top Layer w0.1: v1(69.936,35.027) J9.3@69.936,36.703 ; v1(84.811,53.924) 85.312,54.426 U1.G4@85.312,54.706
  Internal 1 w0.1: v1(69.936,35.027) 82.55,35.027 83.287,35.763 83.287,51.892 83.718,52.324 84.557,52.324 85.166,52.934 85.166,53.569 v1(84.811,53.924)
SDBUS_DO: J9.7 U1.G1 | length 30
  Top Layer w0.1: J9.7@65.536,36.703 65.536,43.485 65.95,43.899 77.505,43.899 U1.G1@85.312,51.706
SDBUS_NCS: J9.2 U1.G5 | length 26.4
  Top Layer w0.1: J9.2@71.036,36.703 71.036,37.592 71.239,37.795 73.101,37.795 85.7,50.394 85.7,51.918 85.649,51.968 85.649,52.4 85.7,52.451 85.7,55.318 U1.G5@85.312,55.706
SWCLK: J11.9 U9.E8 | length 20.2
  Top Layer w0.1: v1(102.438,72.542) U9.E8@102.832,72.148
  Internal 1 w0.1: v1(102.438,72.542) 102.556,72.542 103.776,73.762 103.776,74.896 106.578,77.699 117.982,77.699 J11.9@118.884,78.601
SWDIO: J11.7 U9.D8 | length 24.1
  Top Layer w0.1: v1(101.625,72.555) U9.D8@102.032,72.148
  Internal 1 w0.1: v1(101.625,72.555) 102.057,72.986 102.628,72.986 103.576,73.934 103.576,74.371 102.87,75.077 102.87,76.911 107.1,81.141 J11.7@118.884,81.141
SWO: J11.13 U9.C8 | length 19.3
  Top Layer w0.1: v1(100.838,72.542) U9.C8@101.232,72.148
  Internal 1 w0.1: v1(100.838,72.542) 101.194,72.187 117.55,72.187 J11.13@118.884,73.521
TP1-1: J10.1 U9.J2 | length 13
  Top Layer w0.1: U9.J2@106.032,67.348 106.426,67.742 109.322,67.742 109.804,68.224 109.804,73.736 J10.1@112.141,76.073
TP1-2: J10.2 U9.K2 | length 15.7
  Top Layer w0.1: U9.K2@106.832,67.348 107.251,66.929 112.141,66.929 113.411,68.199 113.411,74.803 J10.2@114.681,76.073
TP1-3: J10.3 U9.L2 | length 9.5
  Top Layer w0.1: U9.L2@107.632,67.348 110.172,67.348 110.668,67.843 110.668,72.06 J10.3@112.141,73.533
TP1-4: J10.4 U9.G10 | length 11.2
  Top Layer w0.1: U9.G10@104.432,73.748 v1(104.826,74.143)
  Internal 1 w0.1: v1(104.826,74.143) 105.181,73.787 109.83,73.787 110.49,74.447 113.767,74.447 J10.4@114.681,73.533
TP1-5: J10.5 U9.G11 | length 9.5
  Top Layer w0.1: U9.G11@104.432,74.548 104.826,74.942 v1(104.826,74.955)
  Internal 2 w0.1: v1(104.826,74.955) 108.179,74.955 J10.5@112.141,70.993
TP1-6: J10.6 U9.D10 | length 20
  Top Layer w0.1: v1(101.676,74.143) 101.879,73.939 102.032,73.939 U9.D10@102.032,73.748
  Bottom Layer w0.1: v1(101.676,74.143) 101.321,73.787 100.584,73.787 100.279,74.092 100.279,75.387 100.482,75.59 107.518,75.59 110.49,72.619 113.055,72.619 J10.6@114.681,70.993
TP1-7: J10.7 U9.D11 | length 18.6
  Top Layer w0.1: v1(101.625,74.955) 101.829,74.752 102.032,74.752 U9.D11@102.032,74.548
  Internal 2 w0.1: v1(101.625,74.955) 101.625,74.778 101.905,74.498 103.886,74.498 104.419,73.965 104.419,67.589 104.648,67.361 111.049,67.361 J10.7@112.141,68.453
TP1-8: J10.8 U9.C10 | length 19.8
  Top Layer w0.1: v1(100.837,74.143) U9.C10@101.232,73.748
  Bottom Layer w0.1: v1(100.837,74.143) 100.482,74.498 100.482,75.209 100.584,75.311 105.105,75.311 105.639,74.778 105.639,73.177 108.737,70.079 113.055,70.079 J10.8@114.681,68.453
TP1-9: J10.9 U9.C11 | length 15.8
  Top Layer w0.1: v1(100.838,74.955) 101.041,74.752 101.232,74.752 U9.C11@101.232,74.548
  Bottom Layer w0.1: v1(100.838,74.955) 100.838,74.778 101.041,74.574 103.48,74.574 J10.9@112.141,65.913
TP2-1: J2.1 U1.N11 | length 40.8
  Top Layer w0.1: U1.N11@91.312,61.706 91.607,62.001 v1(91.821,62.001)
  Bottom Layer w0.1: J2.1@89.281,38.481 90.551,39.751 90.551,42.088 90.881,42.418 92.456,42.418 92.558,42.316 92.558,41.046 92.964,40.64 94.539,40.64 94.844,40.945 94.844,48.844 94.285,49.403 90.881,49.403 90.297,49.987 90.297,50.521 87.274,53.543 87.274,60.274 87.839,60.838 91.09,60.838 91.44,61.189 91.44,61.62 v1(91.821,62.001)
TP2-2: J2.2 U1.N12 | length 31.7
  Top Layer w0.1: J2.2@89.281,35.941 88.367,36.855 88.367,41.707 v1(90.119,43.459) ; U1.N12@91.312,62.706 91.542,62.706 91.948,63.112 v1(91.948,63.195)
  Internal 2 w0.1: v1(90.119,43.459) 89.433,44.145 89.433,62.586 90.043,63.195 v1(91.948,63.195)
TP2-3: J2.3 U1.P10 | length 30
  Top Layer w0.1: U1.P10@92.312,60.706 92.812,61.206 v1(92.812,61.417)
  Internal 1 w0.1: J2.3@86.741,38.481 86.741,40.589 90.373,44.221 90.373,62.484 90.647,62.758 91.161,62.758 91.462,62.456 91.462,61.646 91.487,61.62 92.608,61.62 v1(92.812,61.417)
TP2-4: J2.4 U1.P11 | length 30.7
  Top Layer w0.1: U1.P11@92.312,61.706 92.557,61.951 v1(92.812,61.951)
  Internal 1 w0.1: J2.4@86.741,35.941 88.011,37.211 88.011,40.361 90.805,43.155 v1(90.805,47.803)
  Internal 2 w0.1: v1(90.805,47.803) 90.195,48.412 90.195,54.762 90.277,54.844 92.055,54.844 92.38,55.169 92.38,61.519 v1(92.812,61.951)
TP2-5: J2.5 U1.R12 | length 31.3
  Top Layer w0.1: U1.R12@93.312,62.706 v1(93.802,63.195)
  Internal 1 w0.1: J2.5@84.201,38.481 90.17,44.45 90.17,62.611 90.517,62.958 91.576,62.958 91.77,62.763 93.37,62.763 v1(93.802,63.195)
TP2-6: J2.6 U1.T12 | length 54.5
  Top Layer w0.1: U1.T12@94.312,62.706 v1(97.18,59.838)
  Internal 2 w0.1: J2.6@84.201,35.941 83.287,35.027 83.287,29.997 83.718,29.566 96.723,29.566 97.18,30.023 v1(97.18,59.838)
TP2-7: J2.7 U1.R13 | length 46.8
  Top Layer w0.1: v1(92.812,63.983) 93.035,63.983 U1.R13@93.312,63.706
  Internal 2 w0.1: J2.7@81.661,38.481 80.696,37.516 78.435,37.516 78.207,37.744 78.207,45.771 81.432,48.997 81.432,53.391 83.642,55.601 83.642,57.087 83.597,57.132 83.597,57.422 83.642,57.467 83.642,60.909 84.176,61.443 84.176,64.897 86.69,67.412 91.846,67.412 92.812,66.446 v1(92.812,63.983)
TP2-8: J2.8 U1.T13 | length 43
  Top Layer w0.1: U1.T13@94.312,63.706 94.792,64.186 v1(95.021,64.186)
  Internal 1 w0.1: J2.8@81.661,35.941 80.747,36.855 80.747,49.169 79.451,50.464 79.451,53.365 79.654,53.569 84.023,53.569 84.176,53.721 84.176,56.591 86.665,59.08 86.665,62.586 87.237,63.158 90.691,63.158 91.11,63.576 94.412,63.576 v1(95.021,64.186)
TP2-9: J2.9 U1.R10 | length 39.2
  Top Layer w0.1: U1.R10@93.312,60.706 93.82,61.214 v1(94.005,61.214)
  Internal 2 w0.1: J2.9@79.121,38.481 80.6,39.96 92.05,39.96 92.16,40.07 92.16,50.334 90.424,52.07 90.424,54.441 90.627,54.644 92.693,54.644 93.32,55.27 93.32,60.528 v1(94.005,61.214)
TP3-1: J3.1 U1.R8 | length 30.6
  Top Layer w0.1: U1.R8@93.312,58.706 93.598,58.42 v1(93.802,58.42)
  Bottom Layer w0.1: J3.1@89.281,33.02 90.322,33.02 96.291,38.989 96.291,55.931 v1(93.802,58.42)
TP3-2: J3.2 U1.T7 | length 43.4
  Top Layer w0.1: U1.T7@94.312,57.706 v1(94.668,58.062)
  Internal 2 w0.1: J3.2@89.281,30.48 95.529,30.48 95.936,30.886 95.936,61.57 95.733,61.773 94.64,61.773 94.437,61.57 94.437,60.833 94.31,60.706 94.31,58.42 v1(94.668,58.062)
TP3-3: J3.3 U1.T8 | length 34
  Top Layer w0.1: J3.3@86.741,33.02 85.827,33.934 85.827,43.485 87.224,44.882 92.659,44.882 93.116,45.339 93.116,48.793 91.923,49.987 91.923,52.883 92.253,53.213 92.481,53.213 92.71,53.442 92.71,56.634 93.276,57.201 93.497,57.201 93.802,57.506 93.802,57.785 94.312,58.295 U1.T8@94.312,58.706
TP3-4: J3.4 U1.T9 | length 42
  Top Layer w0.1: U1.T9@94.312,59.706 94.666,60.06 v1(94.666,60.198)
  Internal 2 w0.1: J3.4@86.741,30.48 87.782,31.521 95.123,31.521 95.733,32.131 95.733,61.366 95.529,61.57 94.869,61.57 94.666,61.366 v1(94.666,60.198)
TP3-5: J3.5 U1.T10 | length 39.4
  Top Layer w0.1: U1.T10@94.312,60.706 94.818,61.212 v1(95.023,61.212)
  Internal 2 w0.1: J3.5@84.201,33.02 85.954,34.773 95.098,34.773 95.529,35.204 95.529,60.706 v1(95.023,61.212)
TP3-6: J3.6 U1.R5 | length 35.3
  Top Layer w0.1: J3.6@84.201,30.48 85.411,31.69 93.353,31.69 93.768,32.106 93.768,49.14 93.929,49.301 93.929,52.934 94.082,53.086 94.285,53.086 94.691,53.492 94.691,54.991 94.59,55.093 93.925,55.093 U1.R5@93.312,55.706
TP3-7: J3.7 U1.T5 | length 33.6
  Top Layer w0.1: U1.T5@94.312,55.706 94.775,55.243 v1(95.174,55.243)
  Internal 2 w0.1: J3.7@81.661,33.02 82.771,34.13 82.771,36.416 83.566,37.211 91.592,37.211 95.174,40.792 v1(95.174,55.243)
TP3-8: J3.8 U1.R6 | length 37.7
  Top Layer w0.1: J3.8@81.661,30.48 83.256,32.075 93.131,32.075 93.568,32.512 93.568,49.731 93.701,49.863 93.701,52.984 93.472,53.213 93.142,53.213 92.913,53.442 92.913,56.307 U1.R6@93.312,56.706
TP3-9: J3.9 U1.R7 | length 36.7
  Top Layer w0.1: J3.9@79.121,33.02 78.207,33.934 78.207,39.7 86.792,48.285 86.792,54.864 87.122,55.194 88.595,55.194 88.798,55.397 88.798,57.887 89.002,58.09 89.408,58.09 89.814,58.496 89.814,58.776 90.221,59.182 92.558,59.182 92.812,58.928 92.812,58.206 U1.R7@93.312,57.706
TRIGGERBUTTON: C56.2 R17.2 SW1.1 U9.C2 | length 53.7
  Top Layer w0.1: v1(100.838,66.954) U9.C2@101.232,67.348 ; SW1.1@105.791,29.845 106.655,29.845 106.655,31.699 107.239,32.283 110.095,32.283 111.76,30.618 ; R17.2@111.76,34.417 111.76,30.618 ; C56.2@112.787,29.591 111.76,30.618
  Internal 2 w0.1: v1(100.838,66.954) 100.838,34.798 SW1.1@105.791,29.845
V_UNREG: C44.2 C48.2 C49.2 C52.2 C54.2 C55.2 J8.1 R14.1 U2.1 U2.3 U3.5 U4.3 U5.1 U5.3 U6.1 U6.3 U7.3 U8.3 | length 123.6
  Top Layer w0.4: J8.1@44.45,42.799 44.45,45.314 44.627,45.491 C54.2@44.627,48.006 44.627,49.657 44.5,49.784 C55.2@44.5,51.435 C49.2@44.5,54.356 44.5,55.372 43.383,56.489 43.383,58.623 44.5,59.74 C44.2@44.5,60.833 43.332,62.001 43.332,76.403 43.612,76.683 44.246,76.683 C52.2@44.246,76.835 44.246,77.852 43.256,78.842 43.256,80.9 44.373,82.017 C48.2@44.373,83.058 43.434,83.058 43.18,83.312 43.18,89.814 43.586,90.221 54.178,90.221 55.499,88.9 55.499,88.798 ; v1(53.962,47.625) R14.1@53.962,49.276 ; U6.1@55.118,68.192 v1(55.118,68.986) ; U3.5@55.245,61.856 v1(55.245,62.794) ; U5.1@55.372,82.924 55.372,83.718 54.661,84.43 54.661,86.309 55.499,87.147 U2.1@55.499,88.258 55.499,88.798 ; v1(57.272,62.794) U4.3@57.272,64.001 v1(57.272,64.821) 56.672,65.507 56.672,67.243 U6.3@57.018,68.192 57.018,69.012 57.633,69.626 57.633,71.399 57.018,72.014 U7.3@57.018,72.891 57.018,73.66 57.734,74.376 57.734,76.073 56.891,76.916 U8.3@56.891,77.844 56.891,78.613 57.607,79.329 57.607,81.356 57.272,81.691 U5.3@57.272,82.924 57.272,83.134 57.887,83.749 57.887,87.884 57.709,88.062 57.399,88.062 U2.3@57.399,88.258 57.399,88.854 57.099,89.154 55.855,89.154 55.499,88.798
  Internal 1 w0.4: J8.1@44.45,42.799 49.276,47.625 v1(53.962,47.625)
  Internal 2 w0.4: v1(55.118,68.986) 55.118,66.975 v1(57.272,64.821) ; v1(55.245,62.794) v1(57.272,62.794)
VCC_1V0: C9.2 C10.2 C18.2 C19.2 C20.2 C21.2 C22.2 C23.2 R13.1 U1.E10 U1.F7 U1.F9 U1.F11 U1.G6 U1.H9 U1.J6 U1.K9 U1.L8 U4.5 | length 112
  Top Layer w0.4: R13.1@53.835,55.372 53.835,64.066 v1@55.372,65.603 ; v1(55.372,65.507) v1@55.372,65.603 ; U4.5@55.372,66.301 v1@55.372,65.603 ; v1(71.984,74.161) 71.984,79.705 v1(72.009,79.731) ; v1@83.915,57.309 U1.F7@84.312,57.706 ; U1.F11@84.312,61.706 U1.E10@83.312,60.706 U1.F9@84.312,59.706 v1(84.811,59.207) ; v1(84.811,56.216) 84.816,56.21 U1.G6@85.312,56.706 ; v1(85.801,60.198) 85.82,60.198 U1.H9@86.312,59.706 ; v1(86.816,56.21) U1.J6@87.312,56.706 v1(87.808,57.202) ; U1.K9@88.312,59.706 88.312,59.684 89.312,58.964 ; U1.L8@89.312,58.706 89.312,58.964 ; v1(89.814,59.309) 89.312,58.964
  Internal 1 w0.4: v1(84.811,56.216) 86.72,56.216 86.765,56.261 v1(86.816,56.21) ; v1(84.811,59.207) v1(85.801,60.198) ; v1(87.808,57.202) 87.808,57.302 v1(89.814,59.309)
  Internal 2 w0.4: v1(83.947,57.277) 83.998,57.277 84.811,56.464 ; v1(84.811,56.216) 84.811,56.464 ; v1(84.811,59.207) 84.811,56.464
  Bottom Layer w0.4: v1(55.372,65.507) 55.956,66.091 63.081,66.091 65.761,68.77 C10.2@66.573,68.77 ; C18.2@69.431,51.885 69.431,54.966 69.725,55.26 C19.2@69.725,58.352 69.725,60.655 ; C22.2@70.919,73.767 C22.2@71.444,73.767 ; C23.2@70.993,79.72 71.999,79.72 v1(72.009,79.731) ; v1(71.984,74.161) C22.2@71.444,73.767 ; v1(83.947,57.277) 83.934,57.277 83.502,57.709 78.177,57.709 75.413,60.474 75.413,66.777 75.387,66.802 70.284,66.802 69.725,66.243 69.725,60.655 ; C10.2@66.573,68.77 C10.2@66.877,68.77 68.707,68.77 69.001,68.476 C21.2@70.846,68.476 71.933,68.476 72.371,68.914 72.371,71.901 71.444,72.828 C22.2@71.444,73.767 ; C10.2@66.573,68.77 66.573,67.97 65.481,66.878 65.481,63.602 65.751,63.332 C9.2@66.51,63.332 67.92,63.332 68.005,63.246 C20.2@69.458,63.246 69.458,60.923 69.725,60.655
VCC_1V8: C31.2 C32.2 C33.2 C34.2 C35.2 C36.2 R15.1 U1.G10 U1.J10 U1.K11 U1.L10 U7.5 | length 153.2
  Top Layer w0.4: R15.1@54.089,37.846 v1(54.089,40.31) ; v1(55.118,74.397) U7.5@55.118,75.191 ; v1(63.119,64.908) 63.119,57.988 v1(63.322,57.785) ; v1(84.807,61.211) U1.G10@85.312,60.706 ; U1.J10@87.312,60.706 87.947,61.341 v1@88.677,61.341 ; U1.K11@88.312,61.706 v1@88.677,61.341 ; v1(88.621,61.214) v1@88.712,61.306 ; U1.L10@89.312,60.706 v1@88.712,61.306 ; v1@88.677,61.341 v1@88.712,61.306
  Internal 1 w0.4: v1(54.089,40.31) 54.292,40.513 v1(74.03,40.513)
  Internal 2 w0.4: v1(84.807,61.211) 84.209,60.612 84.209,60.038 84.531,59.715 85.141,59.715 85.496,59.36 85.496,58.09 ; v1(88.621,61.214) 85.496,58.09 ; v1(91.81,40.513) 85.496,46.827 85.496,58.09
  Bottom Layer w0.4: v1(55.118,74.397) 54.61,73.889 54.61,64.618 55.016,64.211 58.638,64.211 59.334,64.908 C36.2@62.103,64.908 v1(63.119,64.908) ; v1(63.322,57.785) v1@63.33,57.792 ; C35.2@63.33,58.818 v1@63.33,57.792 ; C33.2@78.221,41.529 78.221,42.266 ; C31.2@78.221,46.355 C31.2@78.221,45.796 ; C32.2@91.81,41.529 v1(91.81,40.513) 91.81,35.357 91.327,34.874 74.513,34.874 74.03,35.357 v1(74.03,40.513) C34.2@74.03,41.529 74.03,42.266 74.614,42.85 77.637,42.85 78.221,42.266 ; v1@63.33,57.792 63.33,44.443 63.805,43.967 76.392,43.967 C31.2@78.221,45.796 ; 78.221,42.266 C31.2@78.221,45.796
VCC_3V3: C1.2 C2.2 C3.2 C4.2 C5.2 C6.2 C7.2 C8.2 C11.2 C12.2 C13.2 C14.2 C15.2 C16.2 C17.2 C24.2 C25.2 C26.2 C27.2 C28.2 C29.2 C30.2 C37.2 C38.2 C39.2 C40.2 C41.2 C42.2 C43.2 C58.2 C59.2 C60.2 C61.2 C62.2 C63.2 C64.2 C65.2 C66.2 C67.2 C68.2 C69.2 C70.2 C71.2 C72.2 C73.2 C74.2 J1.15 J4.2 J9.4 J11.1 LCD1.1 R1.1 R3.1 R4.1 R5.1 R6.1 R7.1 R8.1 R9.1 R10.1 R11.1 R12.1 R16.1 R17.1 U1.A6 U1.A16 U1.B3 U1.B13 U1.C10 U1.D7 U1.E4 U1.E7 U1.E14 U1.F1 U1.H15 U1.J2 U1.J12 U1.L6 U1.L16 U1.M3 U1.M13 U1.N10 U1.P7 U1.R4 U1.R14 U1.T1 U1.T11 U8.5 U9.D5 U9.D7 U9.F8 U9.G4 U9.G8 U9.H7 U9.K8 U9.K9 U9.L4 U9.L10 XO1.1 XO1.4 XO2.1 XO2.4 XO3.1 XO3.4 | length 647.2
  Top Layer w0.14: U9.D7@102.032,71.348 102.437,71.753 102.996,71.753 103.391,72.148 U9.F8@103.632,72.148
  Top Layer w0.3: U1.E4@83.312,54.706 82.815,55.203 82.815,57.209 U1.E7@83.312,57.706
  Top Layer w0.4: v1(54.089,42.723) R16.1@54.089,43.815 ; v1(54.991,79.35) U8.5@54.991,80.144 ; J9.4@68.836,36.703 v1(68.836,42.723) ; v1(77.682,56.706) U1.A6@79.312,56.706 ; v1(78.816,67.202) U1.A16@79.312,66.706 ; v1(79.807,63.201) U1.B13@80.312,63.706 ; v1(79.832,53.213) 80.086,53.467 80.312,53.467 U1.B3@80.312,53.706 ; U1.D7@82.312,57.706 U1.E7@83.312,57.706 ; v1(82.812,65.206) U1.E14@83.312,64.706 ; U1.E4@83.312,54.706 83.312,54.458 v1(83.82,53.95) ; v1(83.812,51.206) U1.F1@84.312,51.706 ; v1(86.004,66.218) 86.004,66.014 U1.H15@86.312,65.706 ; U1.J2@87.312,52.706 87.808,52.21 v1(87.808,52.197) ; U1.J12@87.312,62.706 87.808,63.202 v1(87.808,63.525) ; v1(88.824,66.218) U1.L16@89.312,66.706 89.56,66.954 v1(89.764,66.954) ; U1.L6@89.312,56.706 89.63,56.388 v1(89.789,56.388) ; v1(89.789,53.183) U1.M3@90.312,53.706 ; v1(89.808,54.21) U1.M3@90.312,53.706 ; U1.M13@90.312,63.706 90.812,64.206 v1(91.015,64.206) ; v1(90.78,53.238) U1.M3@90.312,53.706 ; v1(91.013,54.204) 90.81,54.204 U1.M3@90.312,53.706 ; U1.N10@91.312,60.706 v1(91.82,61.214) ; U1.P7@92.312,57.706 92.614,57.404 v1(92.812,57.404) ; U1.R4@93.312,54.706 93.802,54.216 v1(93.802,54.204) ; U1.R14@93.312,64.706 93.312,64.948 v1(93.802,65.438) ; v1(93.813,62.205) U1.T11@94.312,61.706 ; v1(94.818,52.212) U1.T1@94.312,51.706 98.68,51.706 101.863,54.889 XO3.1@101.863,57.277 ; XO3.4@97.663,57.277 XO3.1@101.863,57.277 ; C74.2@99.579,49.149 99.579,47.955 ; R1.1@99.756,43.053 99.579,46.176 99.579,47.955 ; v1(101.625,70.155) U9.D5@102.032,69.748 v1(102.438,69.342) ; v1(101.625,70.941) U9.D7@102.032,71.348 ; U9.F8@103.632,72.148 U9.G8@104.432,72.148 104.432,72.135 104.467,72.1 104.467,71.873 104.649,71.873 104.957,71.565 104.957,71.383 105.184,71.383 105.219,71.348 U9.H7@105.232,71.348 ; v1(104.038,69.342) U9.G4@104.432,68.948 v1(104.832,68.548) ; U9.K8@106.832,72.148 U9.K9@106.832,72.948 106.832,72.973 107.607,73.748 U9.L10@107.632,73.748 108.229,74.345 108.229,75.133 109.042,75.946 109.042,85.954 v1(109.957,86.868) ; U9.L4@107.632,68.948 v1(108.025,68.555) ; R17.1@113.66,34.417 113.66,35.154 122.616,35.154 123.632,36.17 ; LCD1.1@125.984,89.027 126.843,88.168 J1.15@132.842,88.168 ; R5.1@130.429,44.831 R5.1@130.429,45.136 ; R4.1@130.551,36.703 129.484,37.77 124.572,37.77 R11.1@123.632,36.83 ; R9.1@130.617,60.452 129.55,61.519 124.506,61.519 R8.1@123.312,60.325 123.312,59.304 ; R3.1@130.678,28.829 130.251,28.829 129.184,29.896 123.698,29.896 R10.1@123.698,29.21 123.632,33.086 123.632,36.17 ; R6.1@130.805,52.705 130.353,52.705 129.388,53.67 123.546,53.67 123.317,53.442 ; v1(133.045,45.136) R5.1@130.429,45.136 ; U1.B13@80.312,63.706 80.312,63.96 80.061,64.211 v1(79.807,64.211) U1.B13@80.312,63.706 ; 80.916,60.96 81.058,60.96 ; 80.916,60.96 U1.C10@81.312,60.706 81.058,60.96 ; 80.916,60.96 80.807,61.068 v1(80.747,61.068) 80.747,61.141 80.812,61.206 81.058,60.96 ; 99.579,47.955 100.087,47.447 106.502,47.447 107.194,48.139 ; XO3.1@101.863,57.277 XO2.4@105.156,57.277 XO2.1@109.356,57.277 XO1.4@112.395,57.277 XO1.1@116.595,57.277 ; 107.194,48.139 C72.2@107.199,49.149 107.199,48.144 107.194,48.139 ; 107.194,48.139 107.783,47.549 113.208,47.549 113.93,48.271 C73.2@113.93,49.276 113.93,50.673 116.595,53.338 XO1.1@116.595,57.277 ; XO1.1@116.595,57.277 121.285,57.277 123.312,59.304 ; 123.312,59.304 123.312,56.52 123.317,56.515 123.317,53.442 ; 123.317,53.442 R7.1@123.317,52.705 123.317,48.895 123.444,48.768 123.444,45.593 ; 123.444,45.593 123.749,45.898 130.048,45.898 130.429,45.517 R5.1@130.429,45.136 ; 123.444,45.593 R12.1@123.444,44.831 123.444,41.031 123.632,40.843 R11.1@123.632,36.83 ; 123.632,36.17 R11.1@123.632,36.83
  Internal 1 w0.4: v1(54.089,42.723) v1(68.836,42.723) ; v1(79.807,64.211) 80.12,63.898 81.297,63.898 81.509,64.11 81.509,64.414 82.3,65.206 v1(82.812,65.206) 83.824,66.218 v1(86.004,66.218) ; v1(80.747,61.068) 80.769,61.068 80.85,60.987 78.792,58.93 78.826,58.896 v1(78.826,56.757) 78.826,56.267 78.792,56.234 79.299,55.728 82.042,55.728 v1(83.82,53.95) ; v1(83.812,51.206) 86.817,51.206 v1(87.808,52.197) 88.803,52.197 v1(89.789,53.183) ; v1(87.808,63.525) 90.335,63.525 v1(91.015,64.206) ; v1(91.013,54.204) v1(93.802,54.204) ; v1(91.82,61.214) 92.125,60.909 93.066,60.909 93.312,61.156 93.312,61.703 v1(93.813,62.205) ; v1(102.438,69.342) v1(104.038,69.342) ; v1(104.832,68.548) 105.347,69.063 107.517,69.063 v1(108.025,68.555) ; v1(109.957,86.868) 116.991,86.868 J11.1@118.884,88.761 120.142,87.503 124.46,87.503 LCD1.1@125.984,89.027 ; v1(133.045,45.136) 136.982,45.136 J4.2@138.684,43.434
  Internal 2 w0.4: v1(68.836,42.723) 69.284,43.171 v1(69.284,45.339) ; v1(78.816,67.202) 78.823,67.202 80.309,65.715 80.309,64.46 80.061,64.211 v1(79.807,64.211) ; v1(78.826,56.757) 78.826,56.759 80.315,55.27 80.315,53.696 v1(79.832,53.213) ; v1(79.807,63.201) 79.807,62.008 v1(80.747,61.068) ; v1(83.812,51.206) 83.812,53.942 v1(83.82,53.95) ; v1(89.764,66.954) 90.297,66.954 91.015,66.236 v1(91.015,64.206) ; v1(89.789,56.388) 89.808,56.369 v1(89.808,54.21) ; v1(90.78,53.238) 93.792,53.238 v1(94.818,52.212) ; v1(92.812,57.404) 92.812,60.528 93.497,61.214 93.497,61.889 v1(93.813,62.205) ; v1(101.625,70.155) v1(101.625,70.941)
  Bottom Layer w0.4: v1(54.991,79.35) 57.938,79.35 59.411,80.823 61.697,80.823 ; C37.2@62.615,68.623 61.773,68.623 61.57,68.826 61.57,74.226 61.773,74.429 C38.2@62.615,74.429 C38.2@62.655,74.429 ; C30.2@65.913,57.912 65.123,57.912 65.022,57.81 C29.2@65.022,53.208 65.022,51.359 66.444,49.936 73.558,49.936 73.988,50.366 ; C12.2@66.657,79.867 65.04,79.867 ; C11.2@66.804,74.208 64.813,74.208 ; v1(69.284,45.339) C43.2@69.284,46.373 69.284,47.212 69.494,47.422 73.863,47.422 74.03,47.255 ; C28.2@74.03,46.482 74.03,47.255 ; C2.2@74.041,65.902 74.041,64.215 74.502,63.754 C1.2@74.502,62.1 74.502,59.781 73.903,59.182 73.903,57.709 ; C3.2@74.3,71.71 75.362,71.71 76.152,70.919 C40.2@77.221,70.919 77.221,73.076 77.662,73.517 ; C4.2@74.667,77.221 75.387,77.221 76.912,75.696 C13.2@77.662,75.696 ; v1(77.682,56.706) 76.467,57.921 74.115,57.921 73.903,57.709 ; C6.2@77.736,85.912 77.736,84.938 ; v1(78.816,67.202) 81.263,69.649 ; C8.2@82.439,81.282 82.439,82.093 ; C25.2@82.513,75.843 82.513,73.197 ; C7.2@82.539,86.233 82.539,85.119 ; C26.2@82.666,46.228 82.666,45.426 ; C27.2@82.793,41.529 82.793,43.815 82.666,43.942 82.666,45.426 ; v1(86.004,66.218) v1(88.824,66.218) ; C42.2@87.492,41.529 87.492,45.303 ; v1(87.808,52.197) C15.2@87.808,46.417 ; C67.2@88.762,81.28 88.762,80.467 89.168,80.061 93.645,80.061 94.051,80.467 ; C65.2@89.604,70.478 89.604,71.367 ; v1(89.764,66.954) 90.012,66.706 95.07,66.706 ; v1(89.789,56.388) 91.999,56.388 92.812,57.201 v1(92.812,57.404) ; C41.2@92.318,46.228 92.318,47.041 92.166,47.193 88.584,47.193 C15.2@87.808,46.417 ; v1(93.802,65.438) 95.07,66.706 ; C68.2@94.051,81.208 94.051,80.467 ; C69.2@99.416,77.828 99.416,80.01 99.563,80.157 ; C70.2@99.419,87.376 99.419,84.929 99.563,84.785 C59.2@99.563,82.384 99.563,80.157 ; v1(101.625,70.941) 101.236,70.552 C64.2@94.675,70.552 ; C71.2@104.928,87.602 104.928,85.395 104.854,85.322 C60.2@104.854,82.531 ; C58.2@105.25,77.724 105.25,79.908 ; v1(109.957,86.868) 109.96,86.871 C66.2@109.96,87.884 ; C61.2@109.999,82.531 109.999,81.543 ; J11.1@118.884,88.761 116.383,86.26 116.383,81.559 115.824,81.001 110.541,81.001 109.999,81.543 ; 61.697,80.823 61.443,81.077 61.443,83.515 61.57,83.642 74.053,83.642 74.447,83.248 C5.2@74.594,83.248 77.265,83.248 77.736,83.718 77.736,84.938 ; 61.697,80.823 C39.2@62.468,80.823 64.084,80.823 65.04,79.867 ; C38.2@62.655,74.429 62.875,74.208 64.813,74.208 ; C38.2@62.655,74.429 64.592,74.429 64.813,74.208 ; C38.2@62.655,74.429 61.57,75.514 61.57,79.258 62.179,79.867 65.04,79.867 ; 73.903,57.709 C17.2@73.903,56.896 73.903,54.628 73.988,54.543 C16.2@73.988,51.738 73.988,50.366 ; 73.988,50.366 73.988,49.115 74.03,49.073 74.03,47.255 ; 77.662,73.517 C13.2@77.662,75.696 ; 77.662,73.517 77.662,70.307 78.321,69.649 81.263,69.649 ; C13.2@77.662,75.696 77.662,77.953 78.03,78.32 C24.2@78.03,80.62 78.03,81.686 78.665,82.321 82.211,82.321 82.439,82.093 ; 77.736,84.938 78.001,84.673 82.093,84.673 82.539,85.119 ; 81.263,69.649 82.093,69.649 82.513,70.069 C14.2@82.513,70.256 ; 81.263,69.649 81.871,70.256 C14.2@82.513,70.256 ; 82.439,82.093 82.439,83.693 82.539,83.793 82.539,85.119 ; C14.2@82.513,70.256 82.513,73.197 ; C14.2@82.513,70.256 82.66,70.256 C14.2@82.66,70.405 82.66,73.05 82.513,73.197 ; 82.666,45.426 82.906,45.187 87.376,45.187 87.492,45.303 ; 87.492,45.303 C15.2@87.492,46.101 ; C15.2@87.492,46.101 87.808,46.101 C15.2@87.808,46.417 ; C15.2@87.492,46.101 C15.2@87.808,46.417 ; 89.604,71.367 89.814,71.577 94.421,71.577 94.675,71.323 C64.2@94.675,70.552 ; 89.604,71.367 89.604,73.101 89.927,73.424 C62.2@89.927,76.073 91.719,76.073 91.784,76.137 C63.2@93.61,76.137 93.61,78.435 94.051,78.876 ; 94.051,78.876 94.051,80.467 ; 94.051,78.876 94.051,75.697 95.783,73.965 96.332,73.965 C69.2@99.563,77.196 ; C64.2@94.675,70.552 95.326,69.901 95.326,66.962 95.07,66.706 ; C69.2@99.563,77.196 99.974,76.784 102.006,76.784 104.854,79.632 ; C69.2@99.563,77.196 99.563,80.157 ; 104.854,79.632 105.19,79.968 ; 104.854,79.632 104.854,80.304 ; 104.854,79.632 104.854,77.416 106.147,76.124 108.737,76.124 109.999,77.385 109.999,81.543 ; 104.854,80.304 C60.2@104.854,82.531 ; 104.854,80.304 105.19,79.968 ; C60.2@104.854,82.531 105.25,79.908 ; 105.19,79.968 105.25,79.908
VCC_IN: C47.2 J7.1 J7.2 J7.3 J7.4 J7.5 J7.6 R14.2 U3.3 U3.4 | length 74.5
  Top Layer w0.4: J7.5@44.257,89.154 J7.6@44.257,86.614 45.263,85.608 45.263,81.102 45.153,80.993 45.153,62.162 45.39,61.925 45.39,59.411 44.373,58.394 C47.2@44.373,57.531 v1(44.373,56.515) ; J7.2@49.337,86.614 J7.1@49.337,89.154 ; v1(51.054,48.184) 51.062,48.192 R14.2@51.062,49.276 v1(51.062,51.621) ; U3.3@57.145,59.556 U3.3@57.145,59.893 ; U3.4@57.145,61.856 U3.3@57.145,59.893 ; v1(59.334,59.893) U3.3@57.145,59.893
  Internal 1 w0.4: J7.5@44.257,89.154 J7.3@46.797,89.154 J7.1@49.337,89.154 ; J7.4@46.797,86.614 J7.2@49.337,86.614
  Internal 2 w0.4: v1(44.373,56.515) 44.373,54.865 v1(51.054,48.184) ; v1(51.062,51.621) v1(59.334,59.893)
pads on no net: J4.12 J4.14 J6.1 J9.1 J9.8 J11.2 J11.3 J11.5 J11.11 J11.17 J11.19 LCD1.2 LCD1.7 LCD1.8 LCD1.9 U1.A2 U1.A7 U1.A8 U1.A9 U1.A10 U1.A12 U1.B1 U1.B2 U1.B6 U1.B7 U1.B9 U1.B10 U1.B11 U1.B12 U1.C1 U1.C2 U1.C4 U1.C8 U1.C9 U1.D1 U1.D3 U1.D4 U1.D8 U1.D10 U1.D11 U1.D14 U1.D15 U1.D16 U1.E1 U1.E2 U1.E3 U1.E5 U1.E6 U1.E8 U1.E15 U1.E16 U1.F2 U1.F3 U1.F4 U1.F5 U1.F8 U1.F12 U1.F13 U1.F14 U1.F15 U1.G8 U1.G11 U1.G12 U1.G14 U1.G15 U1.G16 U1.H1 U1.H3 U1.H4 U1.H5 U1.H11 U1.H12 U1.H13 U1.H14 U1.H16 U1.J1 U1.J3 U1.J4 U1.J5 U1.J13 U1.J14 U1.J15 U1.J16 U1.K1 U1.K2 U1.K3 U1.K5 U1.K12 U1.K13 U1.K15 U1.K16 U1.L2 U1.L3 U1.L4 U1.L5 U1.L12 U1.L13 U1.L14 U1.M1 U1.M2 U1.M4 U1.M5 U1.M6 U1.M12 U1.M14 U1.M15 U1.M16 U1.N1 U1.N2 U1.N3 U1.N4 U1.N6 U1.N9 U1.N13 U1.N14 U1.N16 U1.P1 U1.P3 U1.P4 U1.P5 U1.P6 U1.P8 U1.P9 U1.P13 U1.P14 U1.P15 U1.P16 U1.R1 U1.R2 U1.R3 U1.R11 U1.R15 U1.R16 U1.T2 U1.T3 U1.T4 U1.T14 U1.T15 U6.4 U9.A5 U9.A6 U9.A7 U9.A8 U9.A10 U9.A11 U9.B1 U9.B5 U9.B6 U9.B7 U9.B8 U9.B10 U9.B11 U9.C1 U9.C4 U9.C5 U9.C6 U9.D1 U9.D2 U9.D3 U9.D6 U9.E1 U9.E2 U9.E3 U9.E4 U9.E5 U9.E6 U9.E7 U9.F1 U9.F2 U9.F3 U9.F4 U9.F5 U9.F6 U9.F7 U9.G1 U9.G2 U9.G5 U9.G6 U9.G7 U9.H1 U9.H2 U9.H3 U9.H4 U9.H5 U9.H8 U9.H9 U9.H10 U9.H11 U9.J1 U9.J3 U9.J4 U9.J5 U9.J6 U9.J7 U9.J8 U9.J11 U9.K1 U9.K3 U9.K5 U9.K11 U9.L3 U9.L5 U9.L6 U9.L8 XO1.3@117.992,55.88 XO2.3@110.753,55.88 XO3.3@103.26,55.88

## Polygon pours and split planes (outlines as drawn)
no net on GND1 (split plane): 140.841,92.962 140.841,25.783 37.975,25.783 37.975,92.962
no net on VCC (split plane): 140.841,92.962 140.841,25.783 37.975,25.783 37.975,92.962